# Altium PCB PRJCTPCB1.PcbDoc
Units mil, origin at the board's own origin, x right, y up, seen from the top; angles counter-clockwise.
Board outline 6000 x 4000 mil, 2 copper layers (Top Layer, Bottom Layer); 8 components, 9 nets, 35 pads, 0 vias.
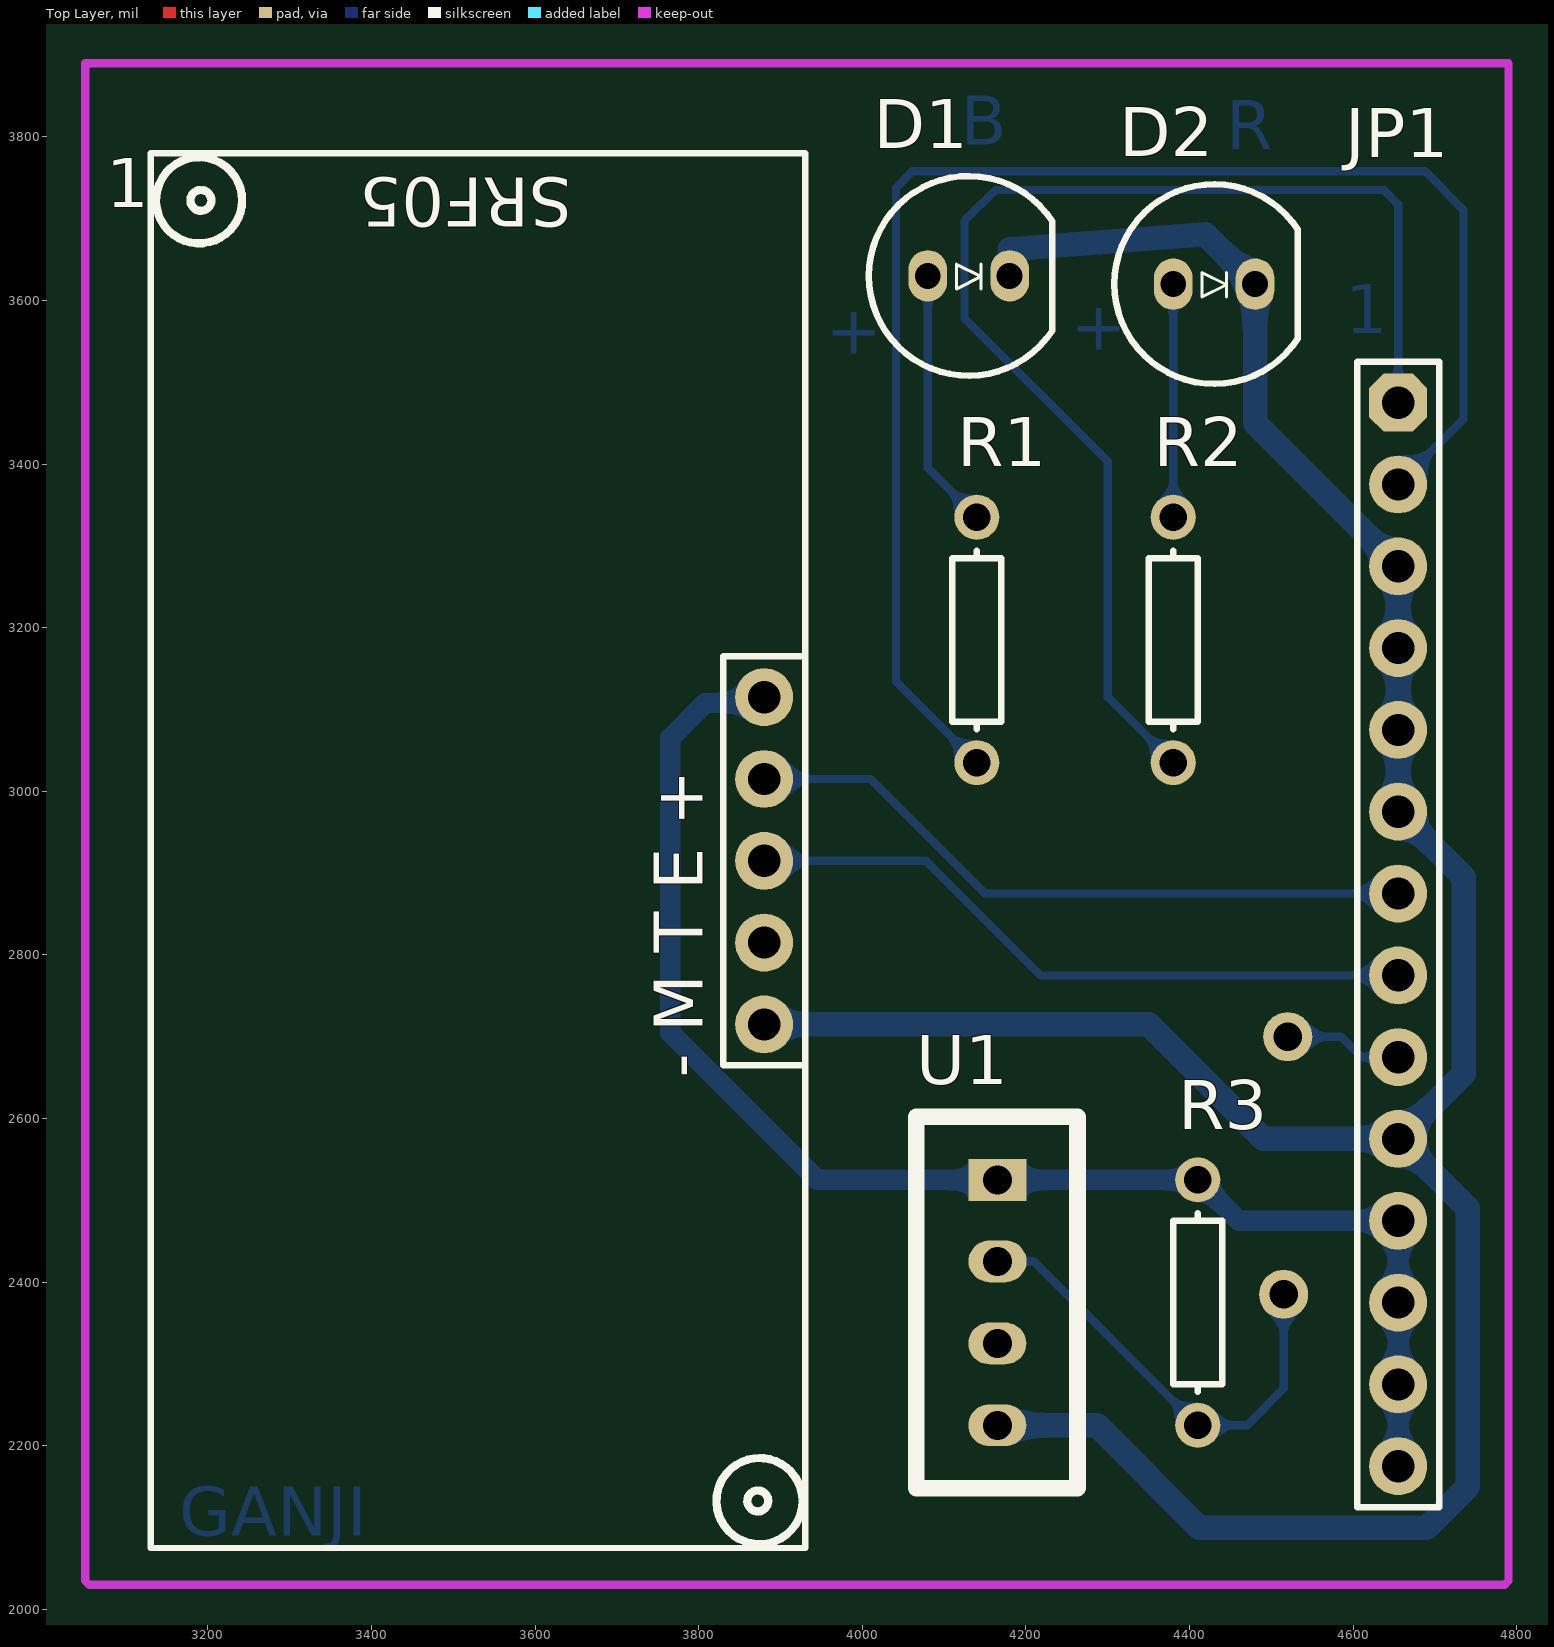
[diagram p0: Top Layer view]
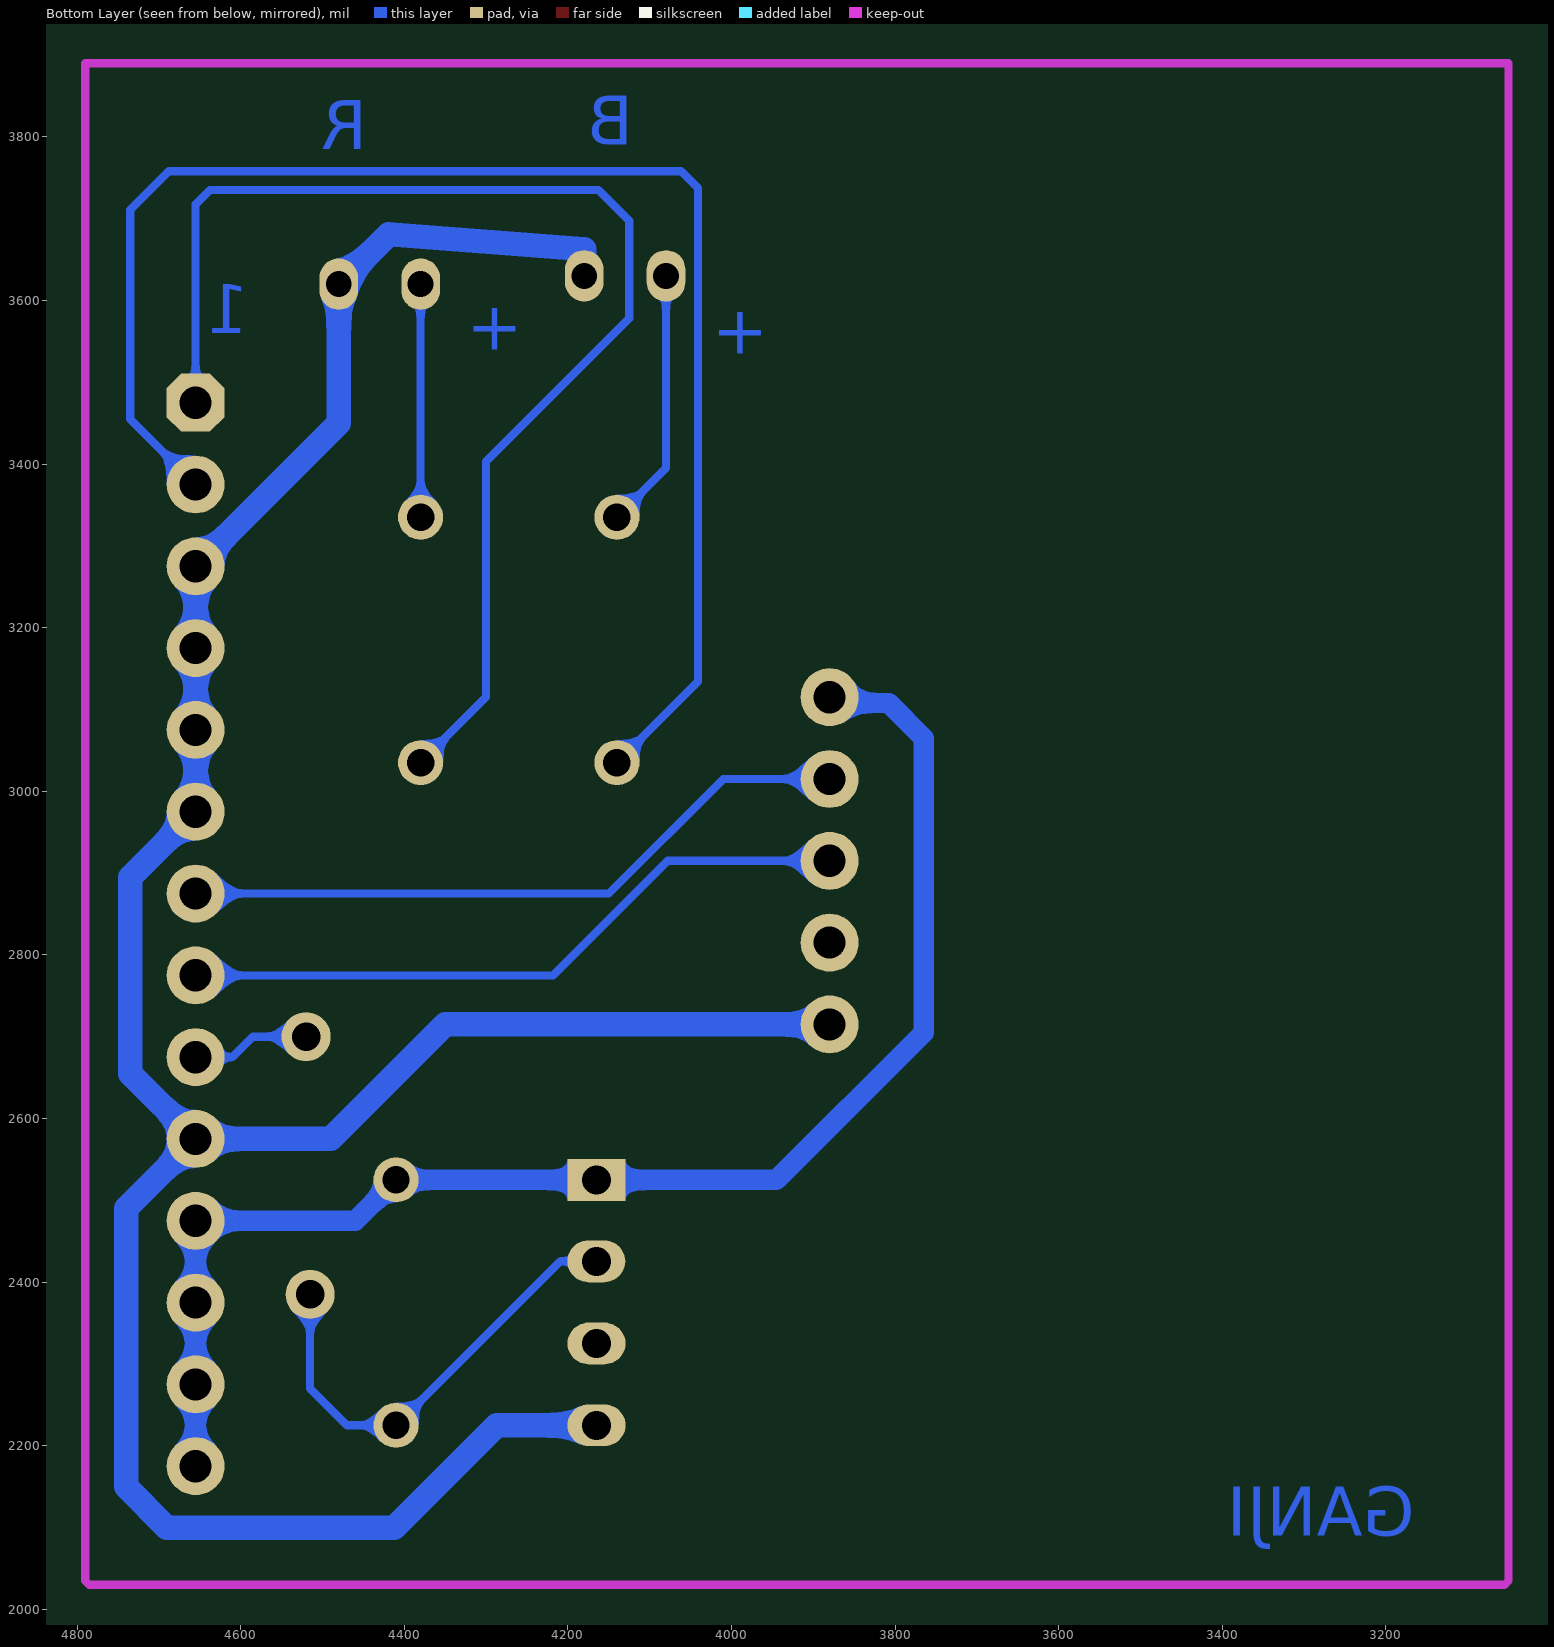
[diagram p1: Bottom Layer view, seen from below]

## Layer stack, top to bottom
Top Solder: solder mask 0.4, Solder Resist, Dk 3.5
Top Layer: signal copper 1.4
Dielectric 1: dielectric 12.6, FR-4, Dk 4.8
Bottom Layer: signal copper 1.4
Bottom Solder: solder mask 0.4, Solder Resist, Dk 3.5

## Board outline
1000,1000 7000,1000 7000,5000 1000,5000

## Design rules (kind name [scope] priority, off if disabled: settings)
Clearance [All] p1: gap=10 ignorepadtopadclearanceinfootprint=FALSE except(0: Arc-Hole Track-Hole SMDPad-Hole THPad-Hole Via-Hole Fill-Hole Poly-Hole Region-Hole Text-Hole; 12: Arc-Arc Arc-Track Track-Track)
PolygonConnect [All] p1: connectstyle=Relief reliefconductorwidth=10 reliefentries=4 polygonreliefangle="90 Angle" airgapwidth=10
RoutingLayers [All] p1: top layer_v5=FALSE bottom layer_v5=TRUE
RoutingVias [All] p1: holewidth=28 width=50 viastyle="Through Hole" minholewidth=28 minwidth=50 maxholewidth=28 maxwidth=50
SilkToSolderMaskClearance [IsText] p1: minsilkscreentomaskgap=10 clearancetoexposedcopper=TRUE
SolderMaskExpansion [All] p1: expansion=4 istentingtop=FALSE
Width Width_2 [InNetClass('OTHER')] p1: maxlimit=10 minlimit=10 preferedwidth=10
Width Width_1 [InNetClass('GND')] p2: maxlimit=30 minlimit=30 preferedwidth=30
Width [InNetClass('VCC')] p3: maxlimit=25 minlimit=25 preferedwidth=25
28 further rules are at their usual default settings.

## Classes and differential pairs
net class OTHER: Net1_2 Net1_3 NetD1_1 NetD2_1 NetJP1_1 NetJP1_2 NetR3_1
net class GND: Net1_5
net class VCC: Net1_1

## Components (designator, comment, footprint, x,y, rotation, side; value= is the part's Value field where it differs from the comment)
1 "SRF05" SRF05 3880,2125 r90 top
D1 "LED 5MM" LED5MM_BLUE 4130,3630 r0 top
D2 "LED 5MM" LED5MM_BLUE 4430,3620 r0 top
JP1 "Header 14" HDR1X14 4655,3475 r270 top
R1 "Res1" AXIAL-0.3 4140,3185 r270 top value=220
R2 "Res2" AXIAL-0.3 4380,3185 r270 top value=220
R3 "Res3" AXIAL-0.3 4410,2375 r90 top value=5K-10K
U1 "DHT11" DHT11 4164,2525 r0 top

## Footprints (in the part's own frame and the unit in brackets; to place one, negate y for a bottom-side part, rotate by r counter-clockwise, add the part's x,y. Pads: shape width x height; smd on the part's side, far side on the other; paste and mask are expansions set on the pad)
AXIAL-0.3 [mm] "Axial Device, Thru-Hole; 2 Leads; 0.3 in Pin Spacing"
  round 1.4 hole 0.85: 1(-3.81,0) 2(3.81,0)
  silkscreen extent -2.77,-0.76 2.77,0.76
DHT11 [mm]
  rect 1.8x1.3 hole 0.9: 1(0.025,0)
  oval 1.8x1.3 hole 0.9: 2(0.03,-2.53) 3(0.025,-5.08) 4(0.025,-7.62)
  silkscreen extent -2.49,-9.58 2.51,1.96
HDR1X14 [mm]
  oct 1.8x1.8 hole 1: 1(0,0)
  round 1.8 hole 1: 2(2.54,0) 3(5.08,0) 4(7.62,0) 5(10.16,0) 6(12.7,0) 7(15.24,0) 8(17.78,0) 9(20.32,0) 10(22.86,0) 11(25.4,0) 12(27.94,0) 13(30.48,0) 14(33.02,0)
  silkscreen extent -1.27,-1.27 34.29,1.27
LED5MM_BLUE [mm] "LED 5MM THROUGH HOLE BLUE-Designer Abbas Basereh"
  oval 1.2x1.6 hole 0.8: 1(-1.27,0) 2(1.27,0)
  silkscreen extent -3.1,-3.1 2.6,3.1, body extent -2.99,-2.98 2.43,3.04, height 12.31
SRF05 [mm] "Connector; Header; 5 Position"
  round 1.8 hole 1: 1(25.146,0) 2(22.606,0) 3(20.066,0) 4(17.526,0) 5(14.986,0)
  silkscreen extent -1.27,-1.27 42.04,19.05

## Part data
1: "SRF05 - Ultra-Sonic Ranger", Designer="Seyed Mohsen ghasemian", WEB=www.picpars.com
D1 D2: "Light Emitting Diode", Data=16-12-2016, Designer="Abbas Basereh"
JP1: "Header, 14-Pin", Publisher="Altium Limited", Revision="17-Jul-2002: Re-released for DXP Platform."
R1: "Resistor", LatestRevisionDate=17-Jul-2002, LatestRevisionNote="Re-released for DXP Platform.", PackageDescription="Axial Device, Thru-Hole; 2 Leads; 0.3 in Pin Spacing", PackageReference=AXIAL-0.3, Published=8-Jun-2000, Publisher="Altium Limited"
R2 R3: library part Res1, "Resistor", LatestRevisionDate=17-Jul-2002, LatestRevisionNote="Re-released for DXP Platform.", PackageDescription="Axial Device, Thru-Hole; 2 Leads; 0.3 in Pin Spacing", PackageReference=AXIAL-0.3, Published=8-Jun-2000, Publisher="Altium Limited"

## Free pads (board coordinates)
  round 60 hole 35: 18(4520,2700) 19(4515,2385)

## Nets (pads, with @x,y where several pads share a name; then routed paths per layer and width w, separated by ;. In a path a pad name is that pad's centre, name@x,y a point inside that pad or via, vN(x,y) a via of type N, cw(c..) or ccw(c..) an arc to the next point about the centre after c; other vN are vias at no path point)
Net1_1: 1.1 JP1.11 JP1.12 JP1.13 JP1.14 R3.2 U1.1 | length 1781
  Bottom Layer w25: 1.1 3872.93,3107.93 3807.93,3107.93 3765,3065 3765,2705 3945,2525 U1.1 R3.2 4460,2475 JP1.11 JP1.12 JP1.13 JP1.14
Net1_2: 1.2 JP1.7 | length 833
  Bottom Layer w10: 1.2 4010,3015 4150,2875 JP1.7
Net1_3: 1.3 JP1.8 | length 833
  Bottom Layer w10: 1.3 4078,2915 4218,2775 JP1.8
Net1_5: 1.5 D1.2 D2.2 JP1.3 JP1.4 JP1.5 JP1.6 JP1.10 U1.4 | length 3482.9
  Bottom Layer w30: 1.5 4350,2715 4490,2575 JP1.10 ; U1.4 4287,2225 4412,2100 4690,2100 4740,2150 4740,2490 JP1.10 ; D1.2 4180,3662.5 4419,3681 D2.2 4480,3450 JP1.3 JP1.4 JP1.5 JP1.6 4735,2895 4735,2655 JP1.10
NetD1_1: D1.1 R1.1 | length 319.9
  Bottom Layer w10: D1.1 4080,3395 R1.1
NetD2_1: D2.1 R2.1 | length 285
  Bottom Layer w10: R2.1 D2.1
NetJP1_1: JP1.1 R2.2 | length 1563.4
  Bottom Layer w10: R2.2 4300,3115 4300,3403 4125,3578 4125,3697.5 4162.5,3735 4637.5,3735 4655,3717.5 JP1.1
NetJP1_2: JP1.2 R1.2 | length 1834.3
  Bottom Layer w10: R1.2 4041,3134 4041,3737.5 4061.5,3758 4687.5,3758 4735,3710.5 4735,3455 JP1.2
NetR3_1: R3.1 U1.2 | length 327.8
  Bottom Layer w10: U1.2 4209.61,2425.39 R3.1
pads on no net: 1.4 JP1.9 U1.3
copper on no net: | length 384
  Bottom Layer w10: 4410,2225 4470,2225 4515,2270 4515,2385 ; 4520,2700 4585,2700 4610,2675 4655,2675

## Keep-outs
Keep-Out Layer:
  lines w10: 3050,2035 3050,3890 4790,3890 4790,2035 4785,2030 3055,2030 3050,2035

## Other copper
Bottom Layer:
  text "B" at 4120,3790 h60
  text "R" at 4445,3785 h60
  text "1" at 4590,3560 h60
  text "+" at 4255,3540 h60
  text "+" at 3955,3535 h60
  text "GANJI" at 3165,2090 h60

## Silkscreen, mask and mechanical layers (free items; w line width, h text height)
Mechanical 1:
  lines w10: 3050,2035 3050,3870 3050,3885 3055,3890 4790,3890 4790,2035 3050,2035

## Text inside footprints (layer, text, board x,y; h text height)
1: Top Overlay "- M T E +" at 3805,2650 h60 r90